# EAGLE board OpenBook_Board (EAGLE 9.7.0)
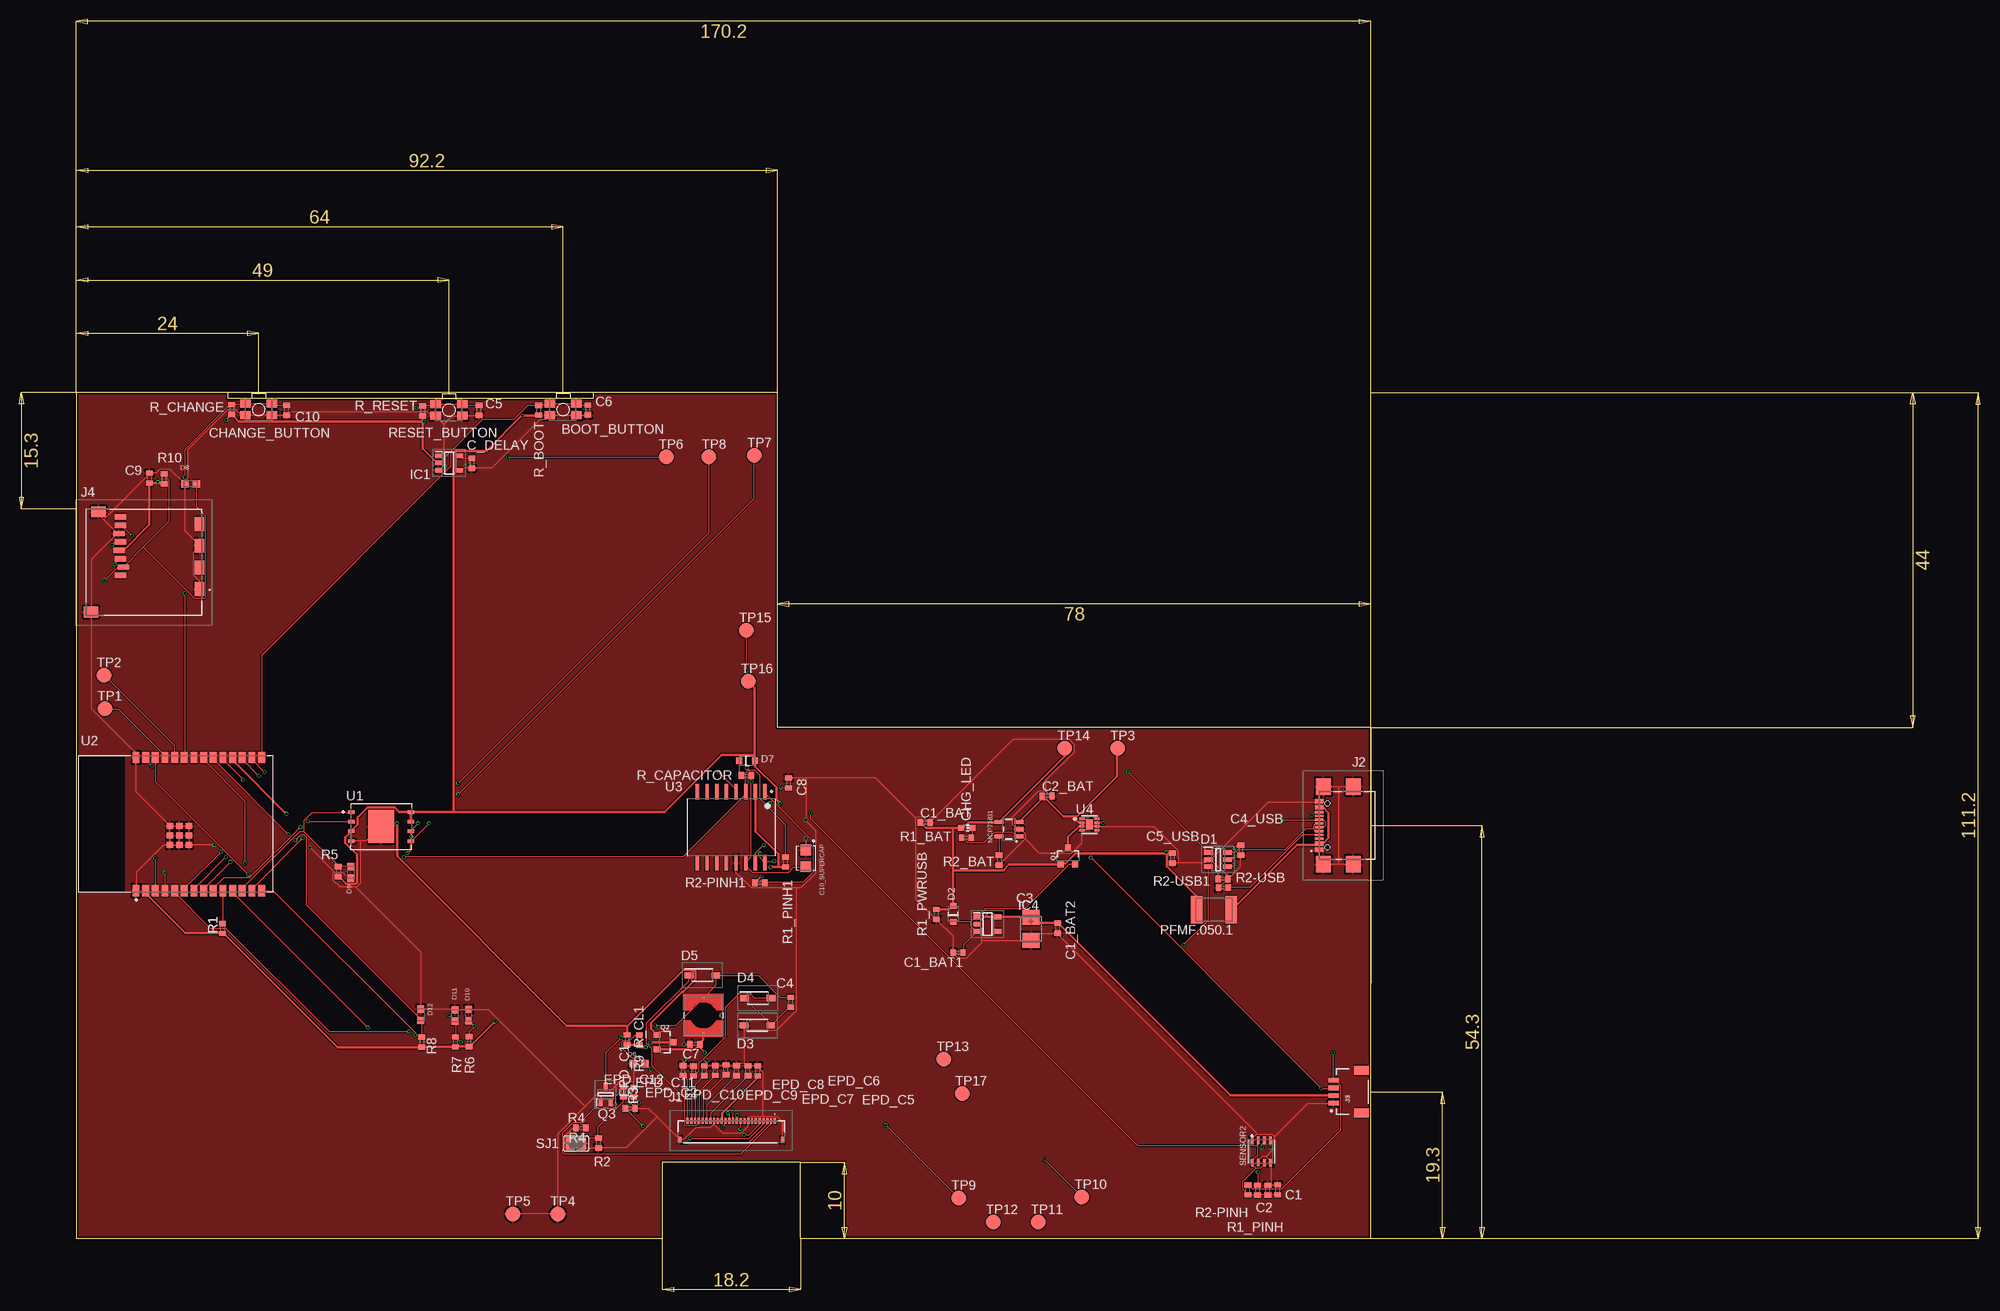
[diagram p0: board, top side]
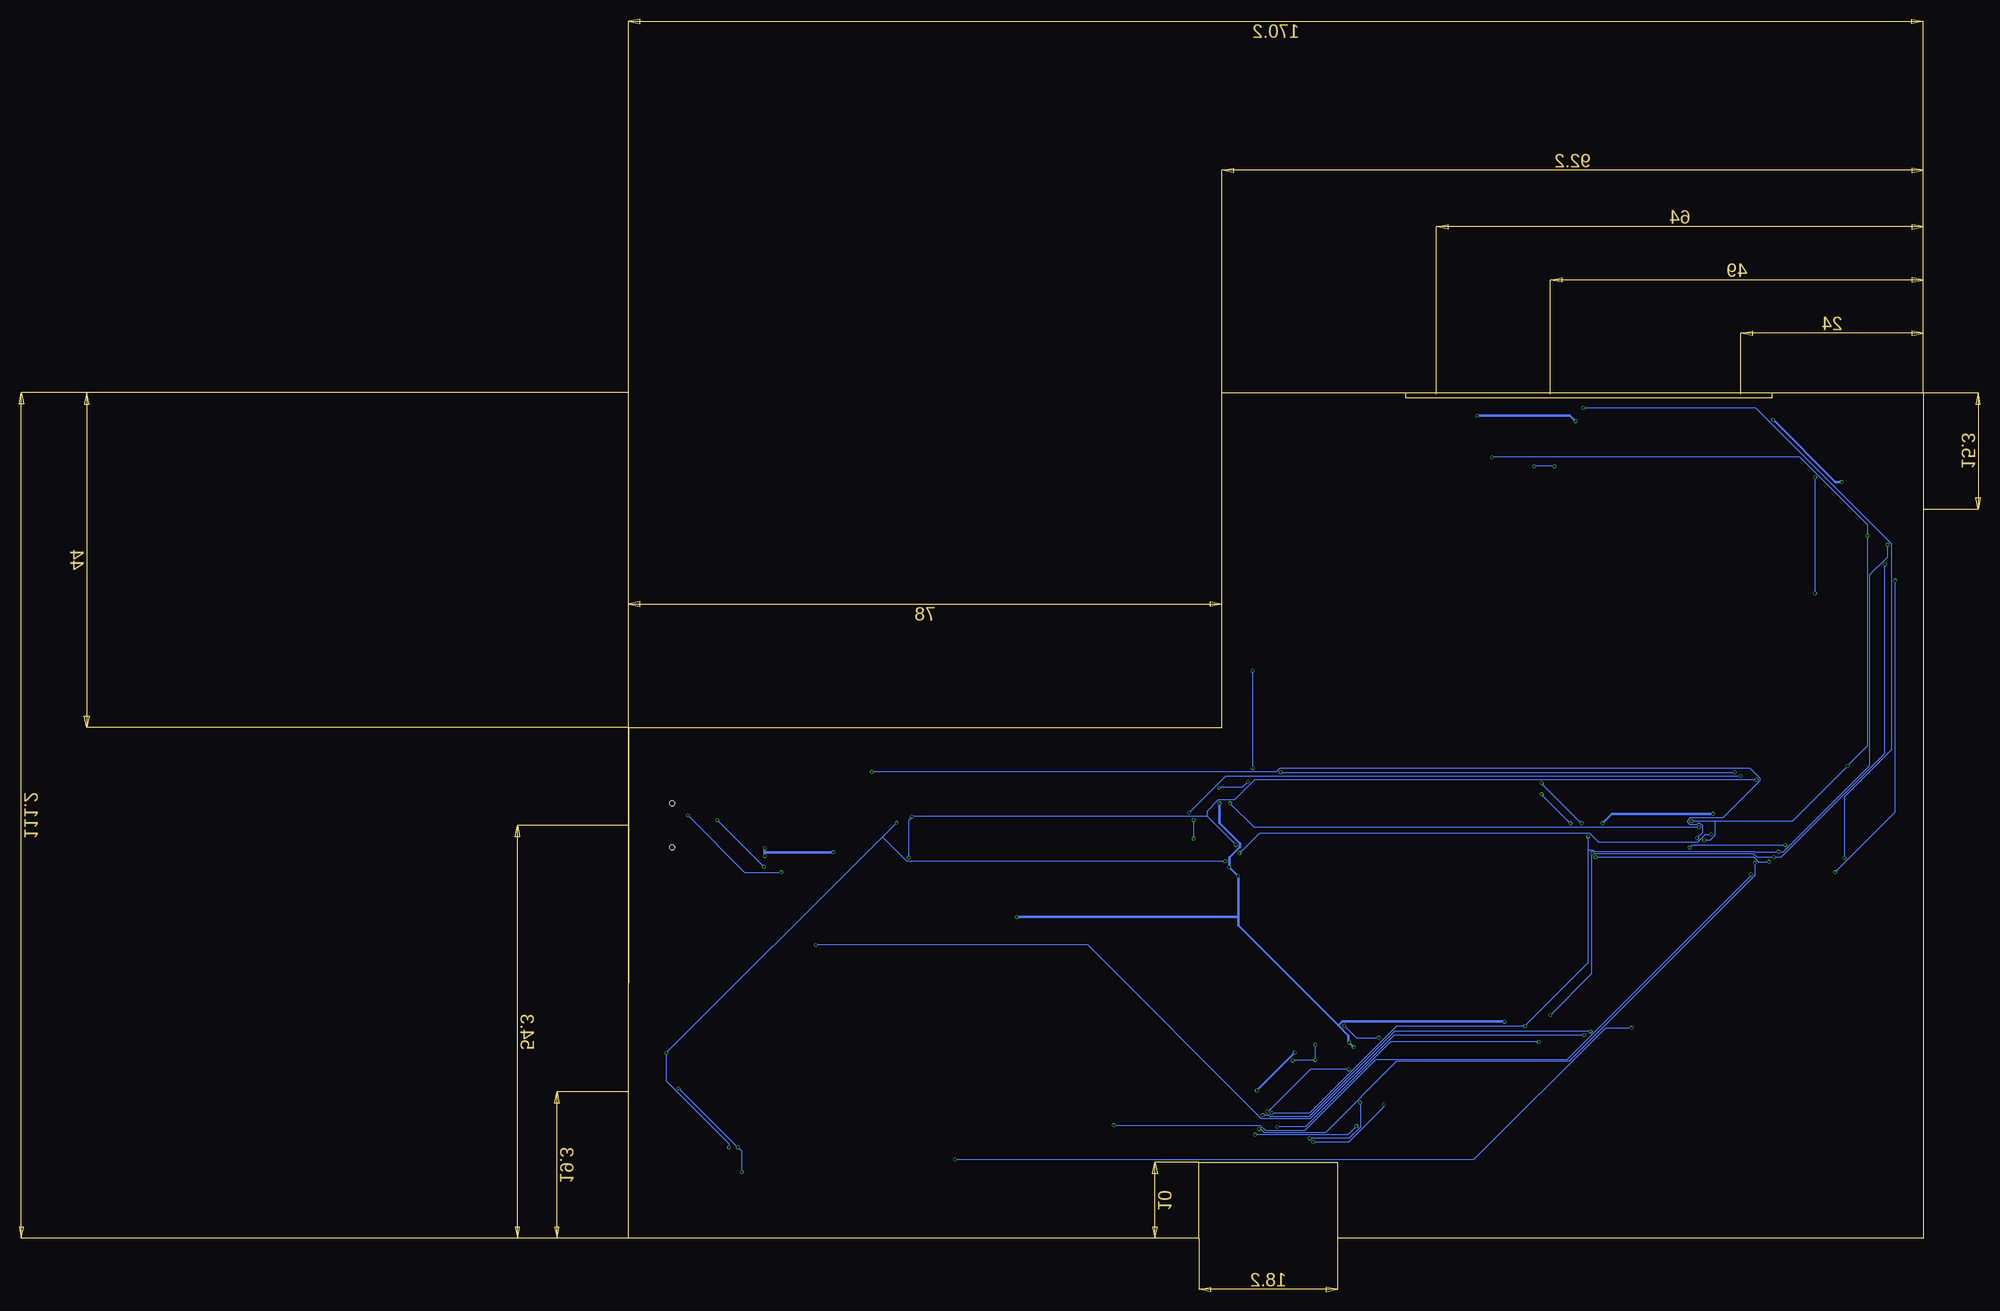
[diagram p1: board, bottom side, seen from below]

Size 170.2 x 111.2 mm. Coordinates in mm from the lower left corner, seen from the top.
Outline: 170.2,67.2 170.2,0 95.2,0 95.2,10 77,10 77,0 0,0 0,111.2 19.9,111.2
Outline: 170.2,67.2 170.2,111.2
Outline: 68,111.2 92.2,111.2 92.2,67.2 170.2,67.2
Outline: 68,111.2 19.9,111.2
Outline: 19.9,111.2 19.9,110.5 68,110.5 68,111.2
Copper layers (1*16): Top 0.035mm / dielectric 1.6mm / Bottom 0.035mm
Design rules "jlcpcb-2layers.dru": minimum track width 5mil, minimum drill 0.3mm, track to track 5mil, track to pad 5mil, pad to pad 5mil, via to via 5mil, smd to smd 5mil, copper to edge 0.2mm, drill to drill 6mil, minimum pad ring 10mil, minimum via ring 3mil, stop-mask expansion 4mil, vias tented up to drill 0mil, thermal gap 10mil
Net classes: 0 default: width 0.15 mm; 1 Power: width 0.3 mm

## Footprints (pad centres in the part's own frame; a part is rotated, then mirrored left to right if it is on the bottom)
MYBUTTON = smd 1.4 x 1.05: 1 1.75,0.75; 2 -1.75,0.75; 3 -1.75,-0.75; 4 1.75,-0.75
EAGLE-LTSPICE_C0402 = smd 0.7 x 0.9: 1 -0.65,0; 2 0.65,0
RCL_CT3528 = smd 2 x 2.2: + -1.5,0; - 1.5,0
CAPCP3225X100N = smd 1.4 x 1.4: 1 -1.1,0; 2 1.1,0
ADAFRUIT_CHIP-LED0603 = smd 0.8 x 0.8: A 0,-0.75; C 0,0.75
SOT95P280X145-6N = smd 1.2 x 0.6: 1 -1.25,0.95; 2 -1.25,0; 3 -1.25,-0.95; 4 1.25,-0.95; 5 1.25,0; 6 1.25,0.95
ESP32_WROVER_AVX---SD0805S020S1R0_AVX_SD0805S020S1R0_0 = smd 0.8 x 0.9: 1 -1.05,0; 2 1.05,0
SOD3716X135N = smd 1.15 x 0.8: 1 -1.75,0; 2 1.75,0
DIOC1608X36N = smd 0.97 x 0.94: 1 -0.75,0; 2 0.75,0
SOT95P280X120-5N = smd 0.9 x 0.6: 1 -1.4,0.95; 2 -1.4,0; 3 -1.4,-0.95; 4 1.4,-0.95; 5 1.4,0.95
FH34SRJ24S05SH99 = smd 0.3 x 0.8: 1 5.75,1.45; 2 5.25,1.45; 3 4.75,1.45; 4 4.25,1.45; 5 3.75,1.45; 6 3.25,1.45; 7 2.75,1.45; 8 2.25,1.45; 9 1.75,1.45; 10 1.25,1.45; 11 0.75,1.45; 12 0.25,1.45; 13 -0.25,1.45; 14 -0.75,1.45; 15 -1.25,1.45; 16 -1.75,1.45; 17 -2.25,1.45; 18 -2.75,1.45; 19 -3.25,1.45; 20 -3.75,1.45; 21 -4.25,1.45; 22 -4.75,1.45; 23 -5.25,1.45; 24 -5.75,1.45 | smd 0.4 x 0.8: MP1 6.75,-1.05; MP2 -6.75,-1.05
SAMACSYS_PARTS_USB4110GFA = smd 0.3 x 1.15: A1 -3.35,3.678; A4 -2.55,3.678; A5 -1.25,3.678; A6 -0.25,3.678; A7 0.25,3.678; A8 1.25,3.678; A9 2.55,3.678; A12 3.35,3.678; B1 3.05,3.678; B4 2.25,3.678; B5 1.75,3.678; B6 0.75,3.678; B7 -0.75,3.678; B8 -1.75,3.678; B9 -2.25,3.678; B12 -3.05,3.678 | smd 2.18 x 2: MP1 -5.11,-0.827; MP2 5.11,-0.827; MP3 -5.11,3.103; MP4 5.11,3.103 | hole 0.65: -2.89,2.603; 2.89,2.603
JST04_1MM_RA = smd 0.6 x 1.35: 1 -1.5,0; 2 -0.5,0; 3 0.5,0; 4 1.5,0 | smd 1.2 x 2: NC1 2.8,-3.675; NC2 -2.8,-3.675
112ATAARR03ATTEND = smd 1.8 x 1.2: G1 10.6,10.4; G2 4.9,10.4; S1 7.75,10.4; S2 2.05,10.4 | smd 1.4 x 1.9: G3 13.6,-3.85; G4 0.45,-2.85 | smd 0.7 x 1.5: P1 8.8,0; P2 7.7,0.4; P3 6.6,0; P4 5.5,-0.2; P5 4.4,0; P6 3.3,-0.2; P7 2.2,0; P8 1.1,0
IND_4828-WE-TPC_WRE = smd 0.127 x 0.127: 1 -2.286,0; 2 2.286,0
ESP32_WROVER_SPARKFUN-IC-POWER_SOT23-5 = smd 0.55 x 1.2: 1 -0.95,-1.3; 2 0,-1.3; 3 0.95,-1.3; 4 0.95,1.3; 5 -0.95,1.3
ESP32C6_VARISTOR_CT/CN1812 = smd 1.5 x 3.6: 1 -2.25,0; 2 2.25,0
ESP32_WROVER_SPARKFUN-DISCRETESEMI_SOT23-3 = smd 0.8 x 0.9: 1 -0.95,-1; 2 0.95,-1; 3 0,1.1
SOT65P210X110-3N = smd 1.05 x 0.5: 1 -1.05,0.65; 2 -1.05,-0.65; 3 1.05,0
ESP32_WROVER_EAGLE-LTSPICE_R0402 = smd 0.7 x 0.9: 1 -0.65,0; 2 0.65,0
ESP32_WROVER_BME680_PSON80P300X300X100-8N = smd 1.016 x 0.5: 1 1.458,1.2; 2 1.458,0.4; 3 1.458,-0.4; 4 1.458,-1.2; 5 -1.458,-1.22; 6 -1.458,-0.4; 7 -1.458,0.4; 8 -1.458,1.2
SJ = smd 1.168 x 1.6: 1 -0.762,0; 2 0.762,0
TP20R = smd 2 x 2: TP 0,0
SON127P600X800X80-9N = smd 0.94 x 0.44: 1 -3.895,1.905; 2 -3.895,0.635; 3 -3.895,-0.635; 4 -3.895,-1.905; 5 3.895,-1.905; 6 3.895,-0.635; 7 3.895,0.635; 8 3.895,1.905 | smd 3.4 x 4.3: 9 0,0
XCVR_ESP32-C6-WROOM-1-N8 = smd 1.5 x 0.9: 1 -8.75,5.26; 2 -8.75,3.99; 3 -8.75,2.72; 4 -8.75,1.45; 5 -8.75,0.18; 6 -8.75,-1.09; 7 -8.75,-2.36; 8 -8.75,-3.63; 9 -8.75,-4.9; 10 -8.75,-6.17; 11 -8.75,-7.44; 12 -8.75,-8.71; 13 -8.75,-9.98; 14 -8.75,-11.25; 15 8.75,-11.25; 16 8.75,-9.98; 17 8.75,-8.71; 18 8.75,-7.44; 19 8.75,-6.17; 20 8.75,-4.9; 21 8.75,-3.63; 22 8.75,-2.36; 23 8.75,-1.09; 24 8.75,0.18; 25 8.75,1.45; 26 8.75,2.72; 27 8.75,3.99; 28 8.75,5.26 | smd 0.8 x 0.8: 29_1 -2.755,0.79; 29_2 -1.505,0.79; 29_3 -0.255,0.79; 29_4 -2.755,-0.46; 29_5 -1.505,-0.46; 29_6 -0.255,-0.46; 29_7 -2.755,-1.71; 29_8 -1.505,-1.71; 29_9 -0.255,-1.71
SOIC127P1032X265-16N = smd 2.05 x 0.59: 1 -4.655,4.445; 2 -4.655,3.175; 3 -4.655,1.905; 4 -4.655,0.635; 5 -4.655,-0.635; 6 -4.655,-1.905; 7 -4.655,-3.175; 8 -4.655,-4.445; 9 4.655,-4.445; 10 4.655,-3.175; 11 4.655,-1.905; 12 4.655,-0.635; 13 4.655,0.635; 14 4.655,1.905; 15 4.655,3.175; 16 4.655,4.445
SON50P200X200X80-9N = smd 0.76 x 0.27: 1 -0.985,0.75; 2 -0.985,0.25; 3 -0.985,-0.25; 4 -0.985,-0.75; 5 0.985,-0.75; 6 0.985,-0.25; 7 0.985,0.25; 8 0.985,0.75 | smd 0.9 x 1.3: 9 0,0

## Placement (x,y rotation side)
BOOT_BUTTON  BOOT_BUTTON  [MYBUTTON]  64,108.97 180 top
C1  100nF  [EAGLE-LTSPICE_C0402]  157.92,6.4 90 top
C1_BAT  4.7uF  [EAGLE-LTSPICE_C0402]  111.6,54.68 0 top
C1_BAT1  4.7uF  [EAGLE-LTSPICE_C0402]  115.93,37.58 180 top
C1_BAT2  4.7uF  [EAGLE-LTSPICE_C0402]  129.02,40.79 270 top
C2  100nF  [EAGLE-LTSPICE_C0402]  156.64,6.35 90 top
C2_BAT  4.7uF  [EAGLE-LTSPICE_C0402]  127.61,58.18 0 top
C3  100uF TANT  [RCL_CT3528]  125.5,40.69 270 top
C4  4.7uF/25V  [EAGLE-LTSPICE_C0402]  93.94,31.05 90 top
C4_USB  100nF  [EAGLE-LTSPICE_C0402]  153.1,51.05 270 top
C5  1uF  [EAGLE-LTSPICE_C0402]  52.97,108.87 270 top
C5_USB  4.7uF  [EAGLE-LTSPICE_C0402]  144.1,49.99 270 top
C6  100nF  [EAGLE-LTSPICE_C0402]  67.26,108.9 270 top
C7  10uF  [EAGLE-LTSPICE_C0402]  81.31,25.54 180 top
C8  100nF  [EAGLE-LTSPICE_C0402]  93.64,59.88 90 top
C9  100nF  [EAGLE-LTSPICE_C0402]  9.64,99.96 90 top
C10  100nF  [EAGLE-LTSPICE_C0402]  27.66,108.86 270 top
C10_SUPERCAP  CPH3225A  [CAPCP3225X100N]  95.92,49.98 270 top
C_DELAY  100nF  [EAGLE-LTSPICE_C0402]  52.02,101.89 270 top
CHANGE_BUTTON  CHANGE_BUTTON  [MYBUTTON]  24,108.97 180 top
CHG_LED  [ADAFRUIT_CHIP-LED0603]  117.05,53.96 270 top
D1  USBLC6-2SC6Y  [SOT95P280X145-6N]  150.09,49.8 0 top
D2  ESP32_WROVER_AVX---SD0805S020S1R0_AVX_SD0805S020S1R0_0_0AVX_SD0805S020S1R0_0_0  [ESP32_WROVER_AVX---SD0805S020S1R0_AVX_SD0805S020S1R0_0]  115.29,42.65 90 top
D3  MBR0530  [SOD3716X135N]  89.56,28 0 top
D4  MBR0530  [SOD3716X135N]  89.6,31.6 0 top
D5  MBR0530  [SOD3716X135N]  82.32,34.61 0 top
D6  PGB1010603MR  [DIOC1608X36N]  73.98,23 0 top
D7  ESP32_WROVER_AVX---SD0805S020S1R0_AVX_SD0805S020S1R0_0_0AVX_SD0805S020S1R0_0_0  [ESP32_WROVER_AVX---SD0805S020S1R0_AVX_SD0805S020S1R0_0]  88.2,62.81 0 top
D8  PGB1010603MR  [DIOC1608X36N]  15.06,99.2 0 top
D9  PGB1010603MR  [DIOC1608X36N]  36.11,48.14 90 top
D10  PGB1010603MR  [DIOC1608X36N]  51.6,29.37 270 top
D11  PGB1010603MR  [DIOC1608X36N]  49.8,29.3 270 top
D12  PGB1010603MR  [DIOC1608X36N]  45.3,29.42 270 top
EPD_C1  1uF/50V  [EAGLE-LTSPICE_C0402]  73.3,19.22 90 top
EPD_C2  1uF/50V  [EAGLE-LTSPICE_C0402]  72.83,17.1 0 top
EPD_C5  1uF/50V  [EAGLE-LTSPICE_C0402]  89.6,22.04 90 top
EPD_C6  1uF/50V  [EAGLE-LTSPICE_C0402]  88.3,22.05 90 top
EPD_C7  1uF/50V  [EAGLE-LTSPICE_C0402]  86.8,22.06 90 top
EPD_C8  1uF/50V  [EAGLE-LTSPICE_C0402]  85.42,22.18 90 top
EPD_C9  1uF/50V  [EAGLE-LTSPICE_C0402]  84.02,22.09 90 top
EPD_C10  1uF/50V  [EAGLE-LTSPICE_C0402]  82.58,22.05 90 top
EPD_C11  1uF/50V  [EAGLE-LTSPICE_C0402]  81.18,22.03 90 top
EPD_C12  1uF/50V  [EAGLE-LTSPICE_C0402]  79.78,22.09 90 top
IC1  BD5229G-TR  [SOT95P280X120-5N]  49.03,101.95 0 top
IC4  XC6220A331MR-G  [SOT95P280X120-5N]  119.77,41.32 0 top
J1  FH34SRJ-24S-0.5SH_99_  [FH34SRJ24S05SH99]  86.1,14 0 top
J2  SAMACSYS_PARTS_USB4110-GF-A  [SAMACSYS_PARTS_USB4110GFA]  167.06,54.3 90 top
J3  QWIIC_RIGHT_ANGLE  [JST04_1MM_RA]  165.28,19.3 90 top
J4  112A-TAAR-R03_ATTEND  [112ATAARR03ATTEND]  5.82,95.96 270 top
L1  68uH  [IND_4828-WE-TPC_WRE]  82.45,29.33 270 top
MCP73831  ESP32_WROVER_SPARKFUN-IC-POWER_MCP73831  [ESP32_WROVER_SPARKFUN-IC-POWER_SOT23-5]  122.61,53.81 90 top
PFMF.050.1  ESP32C6_VARISTORCN1812  [ESP32C6_VARISTOR_CT/CN1812]  149.56,43.2 180 top
Q1  20V/4.2A/52mΩ/1.4W  [ESP32_WROVER_SPARKFUN-DISCRETESEMI_SOT23-3]  130.36,50.26 0 top
Q2  20V/4.2A/52mΩ/1.4W  [ESP32_WROVER_SPARKFUN-DISCRETESEMI_SOT23-3]  77.36,25.82 270 top
Q3  SI1308EDL-T1-GE3  [SOT65P210X110-3N]  69.59,18.95 90 top
R1  10K  [ESP32_WROVER_EAGLE-LTSPICE_R0402]  19.24,40.75 90 top
R1_BAT  200  [ESP32_WROVER_EAGLE-LTSPICE_R0402]  117.02,52.68 0 top
R1_PINH  10K  [ESP32_WROVER_EAGLE-LTSPICE_R0402]  155.28,6.35 90 top
R1_PINH1  10K  [ESP32_WROVER_EAGLE-LTSPICE_R0402]  93.24,49.49 270 top
R1_PWRUSB  100K  [ESP32_WROVER_EAGLE-LTSPICE_R0402]  113.06,42.6 90 top
R2  2.2  [ESP32_WROVER_EAGLE-LTSPICE_R0402]  68.66,12.55 90 top
R2-PINH  10K  [ESP32_WROVER_EAGLE-LTSPICE_R0402]  154,6.39 90 top
R2-PINH1  10K  [ESP32_WROVER_EAGLE-LTSPICE_R0402]  89.87,46.76 180 top
R2-USB  5k1  [ESP32_WROVER_EAGLE-LTSPICE_R0402]  150.74,47.28 0 top
R2-USB1  5k1  [ESP32_WROVER_EAGLE-LTSPICE_R0402]  150.79,46.12 0 top
R2_BAT  2K  [ESP32_WROVER_EAGLE-LTSPICE_R0402]  121.32,49.73 90 top
R3  0.47  [ESP32_WROVER_EAGLE-LTSPICE_R0402]  71.96,19.29 270 top
R4  10K  [ESP32_WROVER_EAGLE-LTSPICE_R0402]  66.33,14.54 180 top
R5  10K  [ESP32_WROVER_EAGLE-LTSPICE_R0402]  34.46,48.21 270 top
R6  10K  [ESP32_WROVER_EAGLE-LTSPICE_R0402]  51.66,25.89 270 top
R7  10K  [ESP32_WROVER_EAGLE-LTSPICE_R0402]  49.86,25.85 270 top
R8  10K  [ESP32_WROVER_EAGLE-LTSPICE_R0402]  45.44,25.81 270 top
R9  10K  [ESP32_WROVER_EAGLE-LTSPICE_R0402]  74.04,26.09 270 top
R10  10K  [ESP32_WROVER_EAGLE-LTSPICE_R0402]  11.56,99.87 270 top
R_BOOT  10K  [ESP32_WROVER_EAGLE-LTSPICE_R0402]  60.8,108.88 90 top
R_CAPACITOR  15  [ESP32_WROVER_EAGLE-LTSPICE_R0402]  88.1,60.86 180 top
R_CHANGE  10K  [ESP32_WROVER_EAGLE-LTSPICE_R0402]  20.46,108.97 90 top
R_CL1  10K  [ESP32_WROVER_EAGLE-LTSPICE_R0402]  72.42,26.12 90 top
R_RESET  10K  [ESP32_WROVER_EAGLE-LTSPICE_R0402]  45.56,108.79 90 top
RESET_BUTTON  RESET BUTTON  [MYBUTTON]  49,108.91 180 top
SENSOR2  BME680  [ESP32_WROVER_BME680_PSON80P300X300X100-8N]  155.77,11.44 90 top
SJ1  [SJ]  65.7,12.48 180 top
TP1  TPTP20R  [TP20R]  3.77,69.64 0 top
TP2  TPTP20R  [TP20R]  3.69,74.04 0 top
TP3  TPTP20R  [TP20R]  136.89,64.42 0 top
TP4  TPTP20R  [TP20R]  63.31,3.22 0 top
TP5  TPTP20R  [TP20R]  57.43,3.22 0 top
TP6  TPTP20R  [TP20R]  77.55,102.72 0 top
TP7  TPTP20R  [TP20R]  89.17,102.92 0 top
TP8  TPTP20R  [TP20R]  83.19,102.72 0 top
TP9  TPTP20R  [TP20R]  116.01,5.32 0 top
TP10  TPTP20R  [TP20R]  132.2,5.44 0 top
TP11  TPTP20R  [TP20R]  126.45,2.14 0 top
TP12  TPTP20R  [TP20R]  120.55,2.14 0 top
TP13  TPTP20R  [TP20R]  114.07,23.57 0 top
TP14  TPTP20R  [TP20R]  129.95,64.44 0 top
TP15  TPTP20R  [TP20R]  88.1,79.94 0 top
TP16  TPTP20R  [TP20R]  88.35,73.24 0 top
TP17  TPTP20R  [TP20R]  116.5,19.04 0 top
U1  W25Q512JVEIQ  [SON127P600X800X80-9N]  40.09,54.16 0 top
U2  ESP32-C6-WROOM-1-N8  [XCVR_ESP32-C6-WROOM-1-N8]  13.13,54.48 90 top
U3  DS3231SN#  [SOIC127P1032X265-16N]  86.1,54.05 270 top
U4  MAX17048G+T10  [SON50P200X200X80-9N]  133.2,54.42 0 top

## Library data of the parts
BOOT_BUTTON CHANGE_BUTTON CHG_LED PFMF.050.1 RESET_BUTTON SJ1 TP1-TP17 = DeskAssistant
C1 C1_BAT C1_BAT1 C1_BAT2 C2 C2_BAT C4 C4_USB C5 C5_USB C6-C10 C_DELAY EPD_C1 EPD_C2 EPD_C5-EPD_C12 = DeskAssistant; SPICEMODEL: NONE; SPICEPREFIX: C
C3 = DeskAssistant; SPICEPREFIX: C
C10_SUPERCAP = DeskAssistant; AVAILABILITY: Not in stock; CHECK_PRICES: https://www.snapeda.com/parts/CPH3225A/Seiko+Instruments/view-part/?ref=eda; DESCRIPTION: 11 mF (EDLC) Supercapacitor 3.3 V 1210 (3225 Metric) - -; MF: Seiko Instruments; MP: CPH3225A; PACKAGE: 1210 Seiko; PRICE: None; PURCHASE-URL: https://www.snapeda.com/api/url_track_click_mouser/?unipart_id=562593&manufacturer=Seiko Instruments&part_name=CPH3225A&search_term=None; SNAPEDA_LINK: https://www.snapeda.com/parts/CPH3225A/Seiko+Instruments/view-part/?ref=snap
D1 = DeskAssistant; AVAILABILITY: In Stock; CHECK_PRICES: https://www.snapeda.com/parts/USBLC6-2SC6Y/STMicroelectronics/view-part/?ref=eda; DESCRIPTION: 17V Clamp 5A (8/20µs) Ipp Tvs Diode Surface Mount SOT-23-6; MF: STMicroelectronics; MP: USBLC6-2SC6Y; PACKAGE: SOT-23-6 STMicroelectronics; PRICE: None; SNAPEDA_LINK: https://www.snapeda.com/parts/USBLC6-2SC6Y/STMicroelectronics/view-part/?ref=snap
D2 D7 = DeskAssistant; CENTROID_NOT_SPECIFIED: No; DATASHEET: http://datasheets.avx.com/schottky.pdf; DIGIKEY_DESCRIPTION: DIODE SCHOTTKY 20V 1A 0805; DIGIKEY_PART_NUMBER: 478-7800-1-ND; LEAD_FREE: yes; MF: AVX; MOUSER_PART_NUMBER: 581-SD0805S020S1R0; PACKAGE: 0805 (2012 metric); PREFIX: D; ROHS: yes; TEMPERATURE_RANGE_HIGH: +125°C; TEMPERATURE_RANGE_LOW: -55°C
D3-D5 = DeskAssistant; AVAILABILITY: In Stock; CHECK_PRICES: https://www.snapeda.com/parts/MBR0530/Onsemi/view-part/?ref=eda; DESCRIPTION: Diode Schottky 30 V 500mA Surface Mount SOD-123; MF: ON Semiconductor; MP: MBR0530; PACKAGE: SOD-123-2 ON Semiconductor; PRICE: None; PURCHASE-URL: https://www.snapeda.com/api/url_track_click_mouser/?unipart_id=179458&manufacturer=ON Semiconductor&part_name=MBR0530&search_term=None; SNAPEDA_LINK: https://www.snapeda.com/parts/MBR0530/Onsemi/view-part/?ref=snap
D6 D8-D12 = DeskAssistant; AVAILABILITY: In Stock; CHECK_PRICES: https://www.snapeda.com/parts/PGB1010603MR/Littelfuse/view-part/?ref=eda; DESCRIPTION: 150V (Typ) Clamp - Ipp Tvs Diode Surface Mount 0603 (1608 Metric); MF: Littelfuse Inc.; MP: PGB1010603MR; PACKAGE: 0603 Littelfuse Inc.; PRICE: None; PURCHASE-URL: https://www.snapeda.com/api/url_track_click_mouser/?unipart_id=5659453&manufacturer=Littelfuse Inc.&part_name=PGB1010603MR&search_term=None; SNAPEDA_LINK: https://www.snapeda.com/parts/PGB1010603MR/Littelfuse/view-part/?ref=snap
IC1 = DeskAssistant; DESCRIPTION: Voltage Detector with Adjustable Delay Time: CMOS processes are utilized to develop high precision, low current consumption CMOS reset ICs that allow arbitrary setting of the delay time. The extensive lineup includes both Nch Open Drain and CMOS output types in a wide range of detection voltages (from 2.3V to 6.0V, in 0.1V steps), enabling selection of the ideal solution based on customer requirements. In addition, the entire series is of course both lead-free and RoHS-compliant.; HEIGHT: 1.25mm; MANUFACTURER_NAME: ROHM Semiconductor; MANUFACTURER_PART_NUMBER: BD5229G-TR; MOUSER_PART_NUMBER: 755-BD5229G-TR; MOUSER_PRICE-STOCK: https://www.mouser.co.uk/ProductDetail/ROHM-Semiconductor/BD5229G-TR?qs=4kLU8WoGk0vvnhrrYwdszw%3D%3D
IC4 = DeskAssistant; DESCRIPTION: LDO Voltage Regulators; HEIGHT: 1.2mm; MANUFACTURER_NAME: Torex; MANUFACTURER_PART_NUMBER: XC6220A331MR-G; MOUSER_PART_NUMBER: 865-XC6220A331MR-G; MOUSER_PRICE-STOCK: https://www.mouser.co.uk/ProductDetail/Torex-Semiconductor/XC6220A331MR-G?qs=AsjdqWjXhJ8ZSWznL1J0gg%3D%3D
J1 = DeskAssistant; DESCRIPTION: 24 Position FFC, FPC Connector Contacts, Top and Bottom 0.020" (0.50mm) Surface Mount, Right Angle; HEIGHT: 1.1mm; MANUFACTURER_NAME: Hirose; MANUFACTURER_PART_NUMBER: FH34SRJ-24S-0.5SH(99); MOUSER_PART_NUMBER: 798-FH34SRJ24S05SH99; MOUSER_PRICE-STOCK: https://www.mouser.co.uk/ProductDetail/Hirose-Connector/FH34SRJ-24S-0.5SH99?qs=vcbW%252B4%252BSTIpKBl5ap9J8Fw%3D%3D
J2 = DeskAssistant; DESCRIPTION: CONN USB 2.0 TYPE-C R/A SMT; HEIGHT: 3.26mm; MANUFACTURER_NAME: GCT (GLOBAL CONNECTOR TECHNOLOGY); MANUFACTURER_PART_NUMBER: USB4110-GF-A; MOUSER_PART_NUMBER: 640-USB4110-GF-A; MOUSER_PRICE-STOCK: https://www.mouser.co.uk/ProductDetail/GCT/USB4110-GF-A?qs=KUoIvG%2F9IlYiZvIXQjyJeA%3D%3D
J3 = DeskAssistant; PROD_ID: CONN-13694
J4 = DeskAssistant; DESCRIPTION: Micro SD Card Socket, Push-Push Type, Top Mount, SMT, H=1.83mm, 10u; HEIGHT: 1.9mm; MANUFACTURER_NAME: ATTEND; MANUFACTURER_PART_NUMBER: 112A-TAAR-R03 ATTEND
L1 = DeskAssistant; COPYRIGHT: Copyright (C) 2024 Ultra Librarian. All rights reserved.; MANUFACTURER_PART_NUMBER: 744043680; MFR_NAME: Wurth Electronics
MCP73831 = DeskAssistant; PROD_ID: IC-09995
Q1 Q2 = DeskAssistant; PROD_ID: TRAN-14388
Q3 = DeskAssistant; AVAILABILITY: In Stock; CHECK_PRICES: https://www.snapeda.com/parts/SI1308EDL-T1-GE3/Vishay+Siliconix/view-part/?ref=eda; DESCRIPTION: Si1308EDL-T1-GE3 N-channel MOSFET Transistor, 1.5 A, 30 V, 3-Pin SC-70 | Siliconix / Vishay SI1308EDL-T1-GE3; MF: Vishay Siliconix; MP: SI1308EDL-T1-GE3; PACKAGE: SOT-323 Vishay Semiconductor; PRICE: None; PURCHASE-URL: https://www.snapeda.com/api/url_track_click_mouser/?unipart_id=274603&manufacturer=Vishay Siliconix&part_name=SI1308EDL-T1-GE3&search_term=None; SNAPEDA_LINK: https://www.snapeda.com/parts/SI1308EDL-T1-GE3/Vishay+Siliconix/view-part/?ref=snap
R1 R1_BAT R1_PINH R1_PINH1 R1_PWRUSB R2 R2-PINH R2-PINH1 R2-USB R2-USB1 R2_BAT R3-R10 R_BOOT R_CAPACITOR R_CHANGE R_CL1 R_RESET = DeskAssistant; SPICEMODEL: NONE; SPICEPREFIX: R
SENSOR2 = DeskAssistant; AVAILABILITY: Unavailable; DESCRIPTION: Integrated Environmental Unit; MF: Bosch Sensortec; MP: BME680; PACKAGE: LGA-8 Bosch Tools; PRICE: None
U1 = DeskAssistant; AVAILABILITY: In Stock; CHECK_PRICES: https://www.snapeda.com/parts/W25Q512JVEIQ/Winbond+Electronics/view-part/?ref=eda; DESCRIPTION: FLASH - NOR Memory IC 512Mb (64M x 8) SPI - Quad I/O 133 MHz 8-WSON (8x6); MF: Winbond Electronics; MP: W25Q512JVEIQ; PACKAGE: Package; PRICE: None; SNAPEDA_LINK: https://www.snapeda.com/parts/W25Q512JVEIQ/Winbond+Electronics/view-part/?ref=snap
U2 = DeskAssistant; AVAILABILITY: In Stock; CHECK_PRICES: https://www.snapeda.com/parts/ESP32-C6-WROOM-1-N8/Espressif+Systems/view-part/?ref=eda; DESCRIPTION: Multiprotocol Modules ESP32-C6 module, Wi-Fi 6 in 2.4 GHz band, Bluetooth 5, Zigbee 3.0 and Thread. ESP34-WROOM Compatible - ENGINEERING SAMPLE; MF: Espressif Systems; MP: ESP32-C6-WROOM-1-N8; PACKAGE: None; PRICE: None; SNAPEDA_LINK: https://www.snapeda.com/parts/ESP32-C6-WROOM-1-N8/Espressif+Systems/view-part/?ref=snap
U3 = DeskAssistant; AVAILABILITY: In Stock; CHECK_PRICES: https://www.snapeda.com/parts/DS3231SN%23/Analog+Devices/view-part/?ref=eda; DESCRIPTION: Extremely Accurate I²C-Integrated RTC/TCXO/Crystal; MF: Analog Devices; MP: DS3231SN#; PACKAGE: SOIC-16 Maxim; PRICE: None; PURCHASE-URL: https://www.snapeda.com/api/url_track_click_mouser/?unipart_id=99048&manufacturer=Analog Devices&part_name=DS3231SN#&search_term=None; SNAPEDA_LINK: https://www.snapeda.com/parts/DS3231SN%23/Analog+Devices/view-part/?ref=snap
U4 = DeskAssistant; AVAILABILITY: In Stock; CHECK_PRICES: https://www.snapeda.com/parts/MAX17048G+T10/Analog+Devices/view-part/?ref=eda; DESCRIPTION: 3µA 1-Cell/2-Cell Fuel Gauge with ModelGauge; MF: Analog Devices; MP: MAX17048G+T10; PACKAGE: TDFN-8 Maxim; PRICE: None; PURCHASE-URL: https://www.snapeda.com/api/url_track_click_mouser/?unipart_id=329239&manufacturer=Analog Devices&part_name=MAX17048G+T10&search_term=None; SNAPEDA_LINK: https://www.snapeda.com/parts/MAX17048G+T10/Analog+Devices/view-part/?ref=snap

## Nets
3V3 [Power]: C1_BAT2.1 C3.+ C9.1 D7.2 IC1.2 IC4.5 J3.2 J4.P4 Q2.3 R1.1 R1_PINH1.2 R2-PINH1.2 R5.2 R6.2 R7.2 R8.2 R9.2 R10.2 R_BOOT.1 R_CHANGE.1 R_CL1.1 R_RESET.1 TP16.TP U1.3 U1.7 U1.8 U2.2 U3.2
32KHZ: R2-PINH1.1 U2.9 U3.1
DN: D1.6 J2.A7 J2.B7
DP: D1.4 J2.A6 J2.B6
EDP_3V3: TP17.TP
EDP_3V3_C: TP13.TP
EDP_BUSY: TP9.TP U2.26
EDP_CS: TP10.TP U2.11
EDP_DC: TP11.TP
EDP_RST: TP12.TP
EPD_3V3 [Power]: C7.1 EPD_C5.1 J1.15 J1.16 L1.2 Q2.2
EPD_3V3_C [Power]: Q2.1 R_CL1.2 U2.18
EPD_BUSY: J1.9
EPD_CS: D6.2 J1.12 R9.1
EPD_DC: J1.11 U2.5
EPD_RST: J1.10 U2.21
FLASH_CS: D9.2 R5.1 U1.1 U2.12
GDR: J1.2 Q3.1 R4.1
GND: BOOT_BUTTON.1 BOOT_BUTTON.2 C1.2 C1_BAT1.2 C1_BAT2.2 C1_BAT.2 C2.2 C2_BAT.2 C3.- C4_USB.2 C5.2 C5_USB.2 C6.2 C7.2 C8.2 C9.2 C10.2 C10_SUPERCAP.1 C_DELAY.2 CHANGE_BUTTON.1 CHANGE_BUTTON.2 D1.2 D3.1 D6.1 D8.1 D9.1 D10.1 D11.1 D12.1 EPD_C1.2 EPD_C2.2 EPD_C5.2 EPD_C6.2 EPD_C7.2 EPD_C8.2 EPD_C9.2 EPD_C10.2 EPD_C11.2 EPD_C12.2 IC1.3 IC4.2 J1.8 J1.17 J1.MP1 J1.MP2 J2.A1 J2.A12 J2.B1 J2.B12 J2.MP1 J2.MP2 J2.MP3 J2.MP4 J3.1 J4.G1 J4.G2 J4.G3 J4.G4 J4.P6 MCP73831.2 R1_PWRUSB.1 R2-USB1.1 R2-USB.2 R2.1 R2_BAT.1 R4.2 RESET_BUTTON.1 RESET_BUTTON.2 SENSOR2.1 SENSOR2.5 SENSOR2.7 SJ1.1 TP4.TP TP5.TP U1.4 U1.9 U2.1 U2.28 U2.29_1 U2.29_2 U2.29_3 U2.29_4 U2.29_5 U2.29_6 U2.29_7 U2.29_8 U2.29_9 U3.13 U4.1 U4.4 U4.6 U4.9
GPIO8: R1.2 U2.10
I2C_PW: C1.1 C2.1 R1_PINH.1 R2-PINH.1 SENSOR2.2 SENSOR2.6 SENSOR2.8 U2.17
INT_RTC: R1_PINH1.1 TP15.TP U2.8 U3.3
IO/BOOT: BOOT_BUTTON.3 BOOT_BUTTON.4 C6.1 R_BOOT.2 U2.15
IO/CHANGE: C10.1 CHANGE_BUTTON.3 CHANGE_BUTTON.4 R_CHANGE.2 U2.23
MISO: D12.2 J4.P7 R8.1 TP6.TP U1.2 U2.27
MOSI: D11.2 J1.14 J4.P3 R7.1 TP7.TP U1.5 U2.7
N$1: J2.A5 R2-USB1.2
N$2: C1_BAT1.1 D2.1 IC4.1 IC4.3 Q1.2
N$3: MCP73831.1 R1_BAT.1
N$4: J2.B5 R2-USB.1
N$5: CHG_LED.C R1_BAT.2
N$6: EPD_C12.1 J1.24
N$7: MCP73831.5 R2_BAT.2
N$8: C4.1 D3.2 D4.1
N$9: C_DELAY.1 IC1.5
N$10: EPD_C10.1 J1.22
N$12: EPD_C8.1 J1.20
N$13: EPD_C7.1 J1.19
N$14: EPD_C6.1 J1.18
N$16: EPD_C2.1 J1.5
N$17: EPD_C1.1 J1.4
N$22: D7.1 R_CAPACITOR.2
PREVGH: D5.1 EPD_C9.1 J1.21
PREVGL: D4.2 EPD_C11.1 J1.23
RESE: J1.3 Q3.2 R3.1
RESE': R2.2 R3.2 SJ1.2
RESET: C5.1 R_RESET.2 RESET_BUTTON.3 RESET_BUTTON.4 U2.3
RTC_RST: U2.16 U3.4
RX: TP2.TP U2.24
SCK: D10.2 J1.13 J4.P5 R6.1 TP8.TP U1.6 U2.6
SCL: J3.4 R2-PINH.2 SENSOR2.4 U2.20 U3.16 U4.7
SDA: J3.3 R1_PINH.2 SENSOR2.3 U2.19 U3.15 U4.8
SRC: C4.2 D5.2 L1.1 Q3.3
SS_SD: D8.2 J4.P2 R10.1 U2.4
TX: TP1.TP U2.25
USB_D+: D1.3 U2.14
USB_D-: D1.1 U2.13
VBAT [Power]: C2_BAT.1 MCP73831.3 Q1.3 TP3.TP U4.2 U4.3
VBUS [Power]: C1_BAT.1 C4_USB.1 C5_USB.1 CHG_LED.A D1.5 D2.2 MCP73831.4 PFMF.050.1.2 Q1.1 R1_PWRUSB.2 TP14.TP
VRTC: C8.1 C10_SUPERCAP.2 R_CAPACITOR.1 U3.14
VUSB [Power]: J2.A4 J2.A9 J2.B4 J2.B9 PFMF.050.1.1

## Tracks (layer width: path | path; a pad name or v marks a point on that pad's centre or on a via)
3V3  (via drill 0.3)
  Top 0.3: 10.73,99.31 11.43,99.31 11.49,99.23 R10.2 | 10.73,99.31 9.7,99.31 C9.1 9.63,99.17 9.63,93.83 6.3,90.51 5.68,90.51 J4.P4 | 45.57,107.41 45.57,103.81 47.37,102 47.58,102 IC1.2 | 45.57,107.41 45.57,108.1 R_RESET.1 | 45.57,107.41 21.4,107.41 20.5,108.31 R_CHANGE.1 20.36,108.24 v19.74,107.61 | R_BOOT.1 60.73,108.17 v58.66,108.17 58.52,108.1 53.95,103.53 49.86,103.53 49.65,103.32 49.65,56.09 | v45.7,107.41 45.57,107.41 | v10.73,99.44 10.73,99.31 | J3.2 165.23,18.84 151.73,18.84 129.15,41.41 C1_BAT2.1 129.01,41.48 126.24,41.48 125.62,42.1 C3.+ 125.48,42.24 121.19,42.24 IC4.5 121.05,42.24 v119.18,42.24 | U2.2 9.14,45.7 9.14,45.36 14.34,40.16 19.18,40.16 R1.1 19.39,40.1 34.35,25.14 45.29,25.14 R8.2 45.5,25.21 R7.2 50,25.28 51.59,25.28 R6.2 51.8,25.28 v55.05,28.53 | U1.7 43.97,54.85 43.97,56.02 U1.8 | R5.2 34.49,47.51 34.62,47.51 35.52,46.6 36.7,46.6 36.91,46.81 36.91,50.48 35.39,52.01 35.39,52.7 36.15,53.46 U1.3 36.22,53.67 36.98,54.43 36.98,55.33 38.3,56.65 41.9,56.65 42.45,56.09 43.84,56.09 U1.8 | 89.19,63.57 89.19,72.37 88.36,73.2 TP16.TP | 89.19,63.57 89.19,62.88 D7.2 89.26,62.67 89.26,62.05 92.03,59.28 92.03,57.69 v92.52,57.2 | R_CL1.1 72.44,25.48 74.03,25.48 R9.2 74.17,25.41 74.44,25.14 v74.86,25.14 | v75.48,25.76 78.39,25.76 Q2.3 | v90.09,47.64 89.26,46.81 R2-PINH1.2 | 92.31,48.82 93.21,48.82 R1_PINH1.2 | 92.31,48.82 v91.27,48.82 | 92.31,48.82 92.31,50.55 89.33,53.53 89.33,58.66 U3.2 | 49.65,56.09 77.35,56.09 84.83,63.57 89.19,63.57 | 49.65,56.09 44.11,56.09 U1.8
  Bottom 0.3: v58.66,108.17 46.47,108.17 v45.7,107.41 | v10.73,99.44 11.56,99.44 v19.74,107.61 | v74.86,25.14 v75.48,25.76 75.55,25.9 75.55,26.66 76.9,28.01 | 76.9,28.01 90.03,41.13 90.03,42.24 | 90.03,42.24 90.03,47.51 v90.09,47.64 v91.27,48.82 91.2,48.96 91.2,50.07 89.82,51.45 89.82,51.94 92.52,54.64 v92.52,57.2 | v55.05,28.53 76.38,28.53 76.9,28.01 | 90.03,42.24 v119.18,42.24
32KHZ  (via drill 0.3)
  Top 0.15: 91.51,57.58 90.58,58.52 90.58,58.66 U3.1 | 91.51,57.58 96.88,52.22 96.88,48.13 95.56,46.81 90.58,46.81 R2-PINH1.1 | v29.5,54.08 22.78,47.37 19.39,47.37 18.07,46.05 18.07,45.77 U2.9 | 91.51,57.58 v91.13,57.2
  Bottom 0.15: v29.5,54.08 88.02,54.08 v91.13,57.2
DN
  Top 0.15: 162.6,53.81 162.81,53.6 163.36,53.6 J2.B7 | 162.6,53.81 162.6,54.29 162.81,54.5 163.36,54.5 J2.A7 | 162.6,53.81 161.56,53.81 158.86,51.11 152.7,51.11 152.35,50.76 151.38,50.76 D1.6
DP  (via drill 0.3)
  Top 0.15: J2.A6 163.43,54.08 163.98,54.08 164.19,54.29 164.19,54.78 163.98,54.98 163.43,54.98 J2.B6 163.36,54.98 v158.51,54.98 | v152.42,48.89 151.38,48.89 D1.4
  Bottom 0.15: v158.51,54.98 v152.42,48.89
EDP_BUSY  (via drill 0.3)
  Top 0.15: v22.64,47.85 10.46,60.04 10.46,63.23 U2.26 | v106.44,14.89 115.99,5.33 TP9.TP
  Bottom 0.15: v22.64,47.85 22.64,47.71 46.81,23.55 71.95,23.55 81.3,14.2 86.49,14.2 87.19,14.89 v106.44,14.89
EDP_CS  (via drill 0.3)
  Top 0.15: v38.36,27.7 20.57,45.5 20.57,45.7 U2.11 | v127.28,10.39 132.2,5.47 TP10.TP
  Bottom 0.15: v38.36,27.7 41.76,27.7 59.07,10.39 v127.28,10.39
EPD_3V3  (via drill 0.3)
  Top 0.3: Q2.2 76.38,24.86 80.12,24.86 80.19,24.79 81.23,24.79 81.92,25.48 C7.1 | L1.2 82.41,27.01 82.41,26.11 81.99,25.69 C7.1 | J1.16 84.42,15.44 84.83,15.44 J1.15 84.9,15.58 84.9,16.48 87.77,19.36 | 87.77,19.36 89.54,21.12 89.54,21.33 EPD_C5.1 | v82.61,24.45 81.85,25.21 C7.1 | v87.6,19.46 87.67,19.46 87.77,19.36
  Bottom 0.3: v87.6,19.46 v82.61,24.45
EPD_3V3_C  (via drill 0.3)
  Top 0.3: 72.44,27.91 72.44,26.8 R_CL1.2 | 72.44,27.91 79.84,35.32 81.23,35.32 81.44,35.11 81.44,34.07 79.78,32.41 79.64,32.41 75.55,28.32 75.55,27.56 76.31,26.8 Q2.1 | v27.63,55.82 20.57,62.88 U2.18 | v42.17,54.57 42.17,50.28 64.47,27.98 72.3,27.98 72.44,27.91
  Bottom 0.3: v27.63,55.82 40.93,55.82 v42.17,54.57
EPD_CS  (via drill 0.3)
  Top 0.15: v86.28,16.69 86.28,15.51 J1.12 | v75.55,22.23 74.79,22.99 D6.2 74.72,23.06 74.1,23.68 73.06,23.68 71.74,25 71.74,25.9 71.88,26.04 72.78,26.04 73.47,26.73 74.03,26.73 R9.1
  Bottom 0.15: v86.28,16.69 86.08,16.69 80.54,22.23 v75.55,22.23
EPD_DC  (via drill 0.3)
  Top 0.15: v86.84,16.2 86.84,15.51 J1.11 | v43.77,27.21 33.24,27.21 19.67,40.79 17.66,40.79 12.95,45.5 12.95,45.7 U2.5
  Bottom 0.15: v86.84,16.2 86.01,16.2 85.8,16 80.75,16 69.53,27.21 v43.77,27.21
EPD_RST  (via drill 0.3)
  Top 0.15: v87.32,14.4 87.32,15.44 J1.10 | v22.16,49.38 22.16,57.55 16.76,62.95 U2.21
  Bottom 0.15: v87.32,14.4 87.12,14.4 86.63,13.92 78.6,13.92 69.25,23.27 46.6,23.27 22.16,47.71 v22.16,49.38
FLASH_CS
  Top 0.15: D9.2 36.08,48.89 34.49,48.89 R5.1 34.49,48.96 29.98,53.46 | 29.98,53.46 29.98,54.98 31.02,56.02 36.15,56.02 U1.1 | 29.98,53.46 29.29,53.46 21.88,46.05 21.88,45.77 U2.12
GDR
  Top 0.15: 66.27,15.23 65.23,15.23 63.85,13.85 63.85,11.43 64.13,11.15 87.39,11.15 91.34,15.1 J1.2 | 66.27,15.23 66.97,14.54 R4.1 | 66.27,15.23 68.9,17.87 Q3.1
GND  (via drill 0.3)
  Top 0.15: U2.29_1 12.33,51.73 12.33,52.91 U2.29_2 12.33,53.05 12.33,54.22 U2.29_3 | U2.29_1 12.4,51.73 13.57,51.73 U2.29_4 13.57,51.8 13.57,52.91 U2.29_5 | U2.29_3 12.4,54.22 13.57,54.22 U2.29_6 13.64,54.22 14.82,54.22 U2.29_9 14.82,54.15 14.82,53.05 U2.29_8 14.89,52.91 14.89,51.73 U2.29_7 14.96,51.73 v18.14,51.73 | U2.1 7.89,45.77 7.89,48.13 11.49,51.73 12.26,51.73 U2.29_1 | U2.29_3 12.33,54.29 7.89,58.72 7.89,63.23 U2.28 7.83,63.29 7.83,63.85 2.01,69.67 2.01,82.34 J4.G3 2.01,82.41 2.01,89.26 5.4,92.66 J4.P6 5.61,92.73 5.4,92.73 3.64,94.49 | C6.2 67.24,108.24 65.79,108.24 BOOT_BUTTON.2 65.72,108.24 62.33,108.24 BOOT_BUTTON.1 62.19,108.17 61.63,107.61 61.01,107.61 54.64,101.24 52.08,101.24 C_DELAY.2 52.01,101.31 51.38,101.31 v51.18,101.52 | 3.64,94.49 2.98,95.15 2.98,95.5 J4.G4 | C5.2 52.91,108.17 RESET_BUTTON.2 50.69,108.1 49.44,108.1 48.41,107.06 48.34,107.06 | 48.34,101.59 47.78,101.04 47.64,101.04 IC1.3 | 48.34,107.06 48.34,101.59 | 48.34,107.06 47.3,108.1 RESET_BUTTON.1 47.23,108.17 46.67,108.17 46.12,108.72 28.18,108.72 27.7,108.24 C10.2 27.63,108.24 25.76,108.24 CHANGE_BUTTON.2 25.69,108.24 22.3,108.24 CHANGE_BUTTON.1 22.23,108.24 21.68,108.24 20.98,108.93 19.94,108.93 14.75,103.74 14.75,99.93 14.2,99.37 D8.1 | D8.1 14.27,99.23 12.4,101.11 11.01,101.11 10.53,100.62 9.7,100.62 C9.2 9.7,100.55 3.64,94.49 | J4.G1 16.2,85.39 16.2,86.42 15.37,87.25 15.37,90.16 16.2,91 J4.G2 16.2,91.13 14.34,93 14.34,99.17 D8.1 | v48.48,101.52 48.41,101.59 48.34,101.59 | 37.33,52.28 38.16,52.28 40.03,54.15 U1.9 | 37.33,52.28 36.22,52.28 U1.4 | 33.93,48.13 35.04,48.13 35.73,47.44 36.08,47.44 D9.1
  Top 0.15: 33.93,48.13 33.79,47.99 33.79,47.09 34.69,46.19 36.84,46.19 | 36.84,46.19 37.33,46.67 37.33,52.28 | 36.84,46.19 36.84,46.12 45.29,37.67 45.29,30.19 D12.1 45.36,30.12 49.79,30.12 D11.1 49.86,30.05 51.59,30.05 D10.1 51.66,30.05 54.22,30.05 66.93,17.35 | 87.88,23.06 87.88,27.35 | 87.88,27.35 87.88,27.98 D3.1 | 87.88,23.06 88.22,22.71 EPD_C6.2 88.36,22.71 89.54,22.71 EPD_C5.2 89.61,22.64 89.61,22.51 90.3,21.81 90.3,16.07 | EPD_C11.2 81.16,22.71 79.84,22.71 EPD_C12.2 79.92,22.78 v79.92,23.48 | v79.92,25.48 80.61,25.48 C7.2 | v82.89,23.41 82.89,22.78 EPD_C10.2 82.61,22.71 84,22.71 EPD_C9.2 84.07,22.78 85.39,22.78 EPD_C8.2 85.39,22.71 86.77,22.71 EPD_C7.2 86.84,22.71 87.19,23.06 87.88,23.06 | TP5.TP 57.48,3.25 63.29,3.25 TP4.TP 63.29,3.32 63.29,13.71 66.93,17.35 | R4.2 65.65,14.47 65.23,14.47 64.13,13.37 64.13,11.56 64.26,11.43 65.58,11.43 66.41,12.26 66.41,12.46 SJ1.1 66.48,12.26 66.83,11.91 68.63,11.91 R2.1 68.7,11.91 72.3,11.91 76.35,15.96 | 73.27,20.5 73.27,22.99 D6.1 | 73.27,20.5 73.27,19.88 EPD_C1.2 73.27,19.8 72.64,19.18 72.64,18.07 73.47,17.24 EPD_C2.2 73.54,17.04 75.28,17.04 76.35,15.96 | 83.79,15.03 83.31,14.54 81.44,14.54 79.92,13.02 79.36,13.02 J1.MP2 79.29,13.02 76.35,15.96 | 83.79,15.03 83.79,15.44 J1.17 | 83.79,15.03 83.86,15.03 84.97,13.92 87.46,13.92 88.29,14.75 88.29,15.44 J1.8 88.36,15.51 88.36,15.86 88.57,16.07 90.3,16.07 | 90.3,16.07 92.1,16.07 92.8,15.37 92.8,13.02 J1.MP1 | 66.93,17.35 68.83,19.25 70.15,19.25 71.4,20.5 73.27,20.5 | J2.B12 163.36,51.24 163.36,50.97 J2.A1 163.43,50.9 163.43,49.72 163.91,49.24 J2.MP3 163.98,49.24 165.92,49.24
  Top 0.15: 165.92,49.24 167.86,49.24 J2.MP1 | 165.92,59.42 163.98,59.42 J2.MP4 163.91,59.35 163.43,58.86 163.43,57.69 J2.A12 163.36,57.62 163.36,57.41 J2.B1 163.29,57.41 156.71,57.41 149.16,49.86 D1.2 | 165.92,59.42 167.86,59.42 J2.MP2 | 165.92,59.42 165.92,49.24 | 144.8,49.38 148.4,49.38 148.82,49.79 D1.2 | 144.8,49.38 144.11,49.38 C5_USB.2 | R2-USB1.1 150.2,46.12 151.38,47.3 R2-USB.2 | C4_USB.2 153.04,50.34 153.04,48.89 151.45,47.3 R2-USB.2 | D1.2 148.89,49.79 149.16,49.79 151.52,47.44 R2-USB.2 | U4.9 133.24,54.36 132.61,53.74 132.27,53.74 U4.4 132.2,53.6 132.2,52.01 130.88,50.69 126.59,50.69 124.79,52.49 124.72,52.49 | U4.1 132.27,55.12 132.54,55.12 133.24,54.43 U4.9 | U4.9 133.31,54.36 133.44,54.22 134.14,54.22 U4.6 134.21,54.15 141.69,54.15 144.8,51.04 144.8,49.38 | 124.72,52.49 121.33,49.1 R2_BAT.1 | 124.72,52.49 124.72,53.25 124.17,53.81 123.96,53.81 MCP73831.2 123.89,53.88 123.61,53.88 123.06,54.43 123.06,55.4 126.52,58.86 127.42,58.86 | 127.42,58.86 128.04,58.24 128.25,58.24 C2_BAT.2 | C1.2 157.89,6.99 C2.2 157.06,7.06 157.06,9.97 SENSOR2.5 156.99,10.04 156.99,10.18 156.44,10.73 | 156.44,10.73 155.88,10.73 155.4,10.25 155.4,10.04 SENSOR2.7 | 155.05,13.64 154.63,13.23 154.63,12.95 SENSOR2.1 | 155.05,13.64 157.27,13.64 157.47,13.43 | 157.47,13.43 157.47,11.84 156.44,10.8 156.44,10.73 | J3.1 165.23,17.8 161.91,17.8 157.54,13.43 157.47,13.43 | 110.39,55.26 110.52,55.4 111.35,55.4 112.05,54.71 112.19,54.71 C1_BAT.2 112.25,54.71 123.2,65.65 130.47,65.65 131.16,64.96 131.16,63.92 127.42,60.18 127.42,58.86 | 110.39,55.26 110.39,44.6 113.02,41.97 R1_PWRUSB.1 113.08,41.9 115.23,39.75 115.23,37.6 C1_BAT1.2 115.3,37.53 115.92,36.91 117.03,36.91 119.04,38.92 119.04,39.2
  Top 0.15: 95.91,60.52 105.05,60.52 110.31,55.26 110.39,55.26 | 95.91,60.52 93.69,60.52 C8.2 | 119.04,39.2 119.04,40.79 118.56,41.27 118.42,41.27 IC4.2 | v95.91,52.56 95.91,51.11 C10_SUPERCAP.1 | 95.91,60.52 v95.91,54.98 95.91,54.91 97.16,53.67 97.16,47.99 95.22,46.05 94.6,46.05 | 94.6,46.05 88.78,46.05 86.77,48.06 86.77,49.38 U3.13 | 119.04,39.2 125.48,39.2 C3.- 125.55,39.2 126.45,40.1 129.01,40.1 C1_BAT2.2 129.01,40.03 155.05,13.99 155.05,13.64 | 87.88,27.35 92.03,27.35 94.6,29.92 94.6,46.05 | v30.75,51.38 33.93,48.2 33.93,48.13
  Bottom 0.15: v48.48,101.52 v51.18,101.52 | v79.92,25.48 v79.92,23.48 82.82,23.48 v82.89,23.41 | v95.91,54.98 v95.91,52.56 | v18.14,51.73 30.4,51.73 v30.75,51.38
  pour Top: 76.96,10.06 76.99,10.07 95.21,10.07 95.24,10.06 95.26,10.04 95.28,10.01 95.28,0.07 170.12,0.07 170.12,67.12 92.19,67.12 92.16,67.14 92.14,67.16 92.12,67.19 92.12,111.12 68.08,111.12 68.08,110.49 68.06,110.46 68.04,110.44 68.01,110.42 19.89,110.42 19.86,110.44 19.84,110.46 19.82,110.49 19.82,111.12 0.07,111.12 0.07,0.07 76.92,0.07 76.92,10.01 76.94,10.04
GPIO8
  Top 0.15: R1.2 19.25,41.41 19.25,45.7 U2.10
I2C_PW  (via drill 0.3)
  Top 0.15: C1.1 157.89,5.75 156.64,5.75 C2.1 156.57,5.75 155.33,5.75 R1_PINH.1 155.26,5.75 154.01,5.75 R2-PINH.1 154.01,5.82 153.32,6.51 153.32,7.48 155.09,9.24 | 155.09,9.24 155.12,9.21 155.67,9.21 156.16,9.7 156.16,9.97 SENSOR2.6 | 155.09,9.24 154.63,9.7 154.63,9.97 SENSOR2.8 154.63,10.04 154.63,10.32 155.33,11.01 155.33,12.19 | 155.33,12.19 155.33,12.88 SENSOR2.2 | v24.03,60.8 21.88,62.95 21.88,63.23 U2.17 | v96.53,55.95 96.53,55.19 139.54,12.19 155.33,12.19
  Bottom 0.15: v24.03,60.8 91.69,60.8 v96.53,55.95
INT_RTC  (via drill 0.3)
  Top 0.15: 88.36,61.56 89.19,61.56 89.82,60.94 89.82,57.82 93.21,54.43 93.21,50.21 R1_PINH1.1 | 88.36,61.56 88.02,61.22 88.02,58.72 U3.3 87.95,58.66 87.95,58.31 79.78,50.14 v43.07,50.14 | v20.29,49.51 16.76,45.98 16.76,45.77 U2.8 | v88.16,74.65 88.16,79.92 TP15.TP | v88.16,61.84 88.36,61.63 88.36,61.56
  Bottom 0.15: v20.29,49.51 21.68,49.51 22.3,50.14 v43.07,50.14 | v88.16,61.84 v88.16,74.65
IO/BOOT
  Top 0.15: C6.1 67.24,109.55 65.93,109.55 65.79,109.69 BOOT_BUTTON.3 65.72,109.76 62.26,109.76 BOOT_BUTTON.4 62.19,109.69 62.05,109.55 60.8,109.55 R_BOOT.2 60.73,109.48 59.35,109.48 57.48,107.61 53.39,107.61 49.24,103.46 49.24,101.52 24.38,76.66 U2.15
IO/CHANGE  (via drill 0.3)
  Top 0.15: C10.1 27.63,109.55 25.9,109.55 25.76,109.69 CHANGE_BUTTON.3 25.69,109.76 22.3,109.76 CHANGE_BUTTON.4 22.23,109.69 22.16,109.62 20.5,109.62 R_CHANGE.2 20.43,109.55 20.15,109.55 14.27,103.67 v14.27,100.07 | v14.27,84.83 14.27,63.29 U2.23
  Bottom 0.15: v14.27,100.07 v14.27,84.83
MISO  (via drill 0.3)
  Top 0.15: R8.1 45.43,26.52 45.43,28.6 45.36,28.67 D12.2 45.29,28.74 45.29,28.88 30.26,43.9 30.26,52.77 29.92,53.12 29.57,53.12 v28.81,52.35 | v30.47,54.85 36.15,54.85 U1.2 | v9.97,62.12 9.14,62.95 U2.27 | v7.34,92.38 6.03,93.69 5.82,93.69 J4.P7 | v56.72,102.7 77.49,102.7 TP6.TP
  Bottom 0.15: 27.42,54.85 17.24,54.85 v9.97,62.12 9.97,62.19 7.34,64.82 v7.34,92.38 7.34,93.76 16.27,102.7 v56.72,102.7 | 27.42,54.85 v30.47,54.85 | v28.81,52.35 28.05,52.35 27.42,52.98 27.42,54.85
MOSI  (via drill 0.3)
  Top 0.15: v84.97,14.68 85.32,15.03 85.32,15.44 J1.14 | v50.55,25.83 49.86,26.52 R7.1 49.86,28.53 D11.2 49.79,28.6 v49.03,29.36 | v43.56,50.62 43.97,51.04 43.97,52.22 U1.5 44.04,52.22 v46.4,54.57 | v19.67,50.14 15.51,45.98 15.51,45.77 U2.7 | v5.05,88.64 5.75,89.33 J4.P3 | v50.21,58.38 89.12,97.3 89.12,102.91 TP7.TP
  Bottom 0.15: v84.97,14.68 81.23,14.68 70.08,25.83 v50.55,25.83 | v49.03,29.36 43.56,34.83 v43.56,50.62 22.37,50.62 21.88,50.14 v19.67,50.14 18.7,50.14 5.05,63.78 v5.05,88.64 | v46.4,54.57 v50.21,58.38
N$1
  Top 0.15: R2-USB1.2 154.29,46.12 161.21,53.05 163.36,53.05 J2.A5
N$2
  Top 0.15: C1_BAT1.1 116.62,37.6 116.62,38.57 118.35,40.3 IC4.3 118.35,40.44 118.21,40.44 117.59,41.06 117.59,41.62 | 117.59,41.62 115.3,41.62 D2.1 | 117.59,41.62 118.21,42.24 118.35,42.24 IC4.1 118.42,42.31 119.53,43.42 124.72,43.42 130.54,49.24 131.3,49.24 Q1.2
N$3
  Top 0.15: R1_BAT.1 116.41,52.63 116.62,52.63 117.24,52.01 119.25,52.01 120.63,53.39 123.13,53.39 123.61,52.91 123.89,52.91 MCP73831.1
N$4  (via drill 0.3)
  Top 0.15: v150.13,48.13 150.13,47.3 R2-USB.1 | v162.39,55.61 162.81,56.02 163.36,56.02 J2.B5
  Bottom 0.15: v150.13,48.13 154.91,48.13 v162.39,55.61
N$5
  Top 0.15: CHG_LED.C 117.79,53.95 117.79,52.77 117.72,52.7 R1_BAT.2
N$6
  Top 0.15: J1.24 80.33,15.51 80.33,20.91 79.84,21.4 EPD_C12.1
N$7
  Top 0.15: R2_BAT.2 121.33,50.41 121.33,52.84 MCP73831.5
N$8
  Top 0.15: C4.1 93.9,30.33 93.63,30.33 91.34,28.05 D3.2 91.34,28.12 87.88,31.58 D4.1
N$9
  Top 0.15: C_DELAY.1 52.01,102.56 50.76,102.56 50.48,102.84 IC1.5
N$10
  Top 0.15: J1.22 81.37,15.51 81.37,20.22 82.55,21.4 EPD_C10.1
N$12
  Top 0.15: J1.20 82.41,15.51 82.41,18.49 85.39,21.47 EPD_C8.1
N$13
  Top 0.15: J1.19 82.89,15.51 82.89,17.52 86.77,21.4 EPD_C7.1
N$14
  Top 0.15: J1.18 83.38,15.51 83.38,16.48 EPD_C6.1
N$16  (via drill 0.3)
  Top 0.15: v87.81,13.64 88.43,13.64 89.82,15.03 89.82,15.44 J1.5 | v74.51,14.75 72.23,17.04 EPD_C2.1
  Bottom 0.15: v87.81,13.64 75.62,13.64 v74.51,14.75
N$17  (via drill 0.3)
  Top 0.15: v80.68,13.16 88.43,13.16 90.3,15.03 90.3,15.44 J1.4 | v74.03,17.87 73.34,18.56 EPD_C1.1
  Bottom 0.15: v80.68,13.16 75.48,13.16 74.03,14.61 v74.03,17.87
N$22
  Top 0.15: D7.1 87.19,62.81 87.19,61.08 87.39,60.87 R_CAPACITOR.2
PREVGH
  Top 0.15: EPD_C9.1 84,21.4 81.85,19.25 81.85,15.51 J1.21 81.78,15.44 81.78,15.03 81.58,14.82 80.12,14.82 79.98,14.96 79.98,18.42 75.69,22.71 75.69,24.93 75,25.62 75,28.32 80.54,33.86 80.54,34.56 D5.1
PREVGL
  Top 0.15: J1.23 80.88,15.51 80.88,21.05 81.16,21.33 EPD_C11.1 81.23,21.4 81.85,22.02 81.85,23.06 82.06,23.27 82.13,23.27 85.39,26.52 85.39,30.4 87.25,32.27 88.5,32.27 89.12,31.65 91.34,31.65 D4.2
RESE  (via drill 0.3)
  Top 0.15: v80.19,12.67 88.43,12.67 90.79,15.03 90.79,15.44 J1.3 | Q3.2 70.29,17.87 70.57,17.59 v70.91,17.59 70.91,18.7 71.95,19.74 71.95,19.88 R3.1
  Bottom 0.15: v80.19,12.67 75.55,12.67 70.91,17.31 v70.91,17.59
RESE'
  Top 0.15: SJ1.2 64.96,12.53 64.96,12.67 65.79,13.5 67.17,13.5 67.45,13.23 68.63,13.23 R2.2 68.63,13.3 68.63,14.68 71.95,18 71.95,18.63 R3.2
RESET  (via drill 0.3)
  Top 0.15: C5.1 52.91,109.55 50.83,109.55 50.76,109.62 RESET_BUTTON.3 50.69,109.69 47.3,109.69 RESET_BUTTON.4 47.23,109.62 47.09,109.48 45.57,109.48 R_RESET.2 45.5,109.42 45.29,109.21 v44.74,109.21 | v10.39,50 10.39,45.77 U2.3
  Bottom 0.15: v10.39,50 10.39,58.03 4.22,64.19 4.22,91.34 22.09,109.21 v44.74,109.21
RTC_RST  (via drill 0.3)
  Top 0.15: v24.79,61.29 23.13,62.95 23.13,63.23 U2.16 | v84.48,61.29 86.7,59.07 86.7,58.72 U3.4
  Bottom 0.15: v84.48,61.29 v24.79,61.29
RX
  Top 0.15: U2.24 12.88,63.29 12.88,64.89 3.74,74.03 TP2.TP
SCK  (via drill 0.3)
  Top 0.15: v85.66,16.48 85.8,16.34 85.8,15.51 J1.13 | D10.2 51.66,28.6 v52.35,27.91 52.35,27.84 51.66,27.15 51.66,26.59 R6.1 | v44.04,52.84 44.04,53.46 U1.6 43.97,53.6 v44.94,54.57 | v19.04,50.83 14.27,46.05 14.27,45.77 U2.6 | v4.71,91.2 5.05,91.55 5.75,91.55 J4.P5 | v50.21,59.83 83.17,92.8 83.17,102.7 TP8.TP
  Bottom 0.15: v85.66,16.48 80.68,16.48 69.25,27.91 v52.35,27.91 52.35,27.98 44.04,36.29 44.04,51.11 | 44.04,51.11 v44.04,52.84 | 44.04,51.11 43.42,51.11 43.21,50.9 22.23,50.9 22.16,50.83 v19.04,50.83 18.42,50.83 7.06,62.19 7.06,87.25 4.71,89.61 v4.71,91.2 | v44.94,54.57 v50.21,59.83
SCL  (via drill 0.3)
  Top 0.15: v134.97,54.64 134.21,54.64 U4.7 | v165.23,24.38 165.23,20.84 J3.4 165.3,20.77 165.58,20.77 166.2,20.15 166.2,14.2 158.44,6.44 154.7,6.44 154.15,6.99 154.01,6.99 R2-PINH.2 | v156.99,11.98 156.99,12.88 SENSOR2.4 | v27.91,53.12 18.07,62.95 18.07,63.23 U2.20 | v89.89,50.62 89.89,50.07 90.51,49.44 U3.16 90.58,49.44 90.72,49.58 v91.76,49.58
  Bottom 0.15: 136.8,52.8 v165.23,24.38 165.23,20.71 156.99,12.46 v156.99,11.98 | 136.8,52.8 v134.97,54.64 | v27.91,53.12 28.67,53.12 29.64,52.15 42.73,52.15 43.9,53.32 87.19,53.32 v89.89,50.62 | 136.8,52.8 133.58,49.58 v91.76,49.58
SDA  (via drill 0.3)
  Top 0.15: v155.33,8.73 155.33,7.06 R1_PINH.2 | v155.81,11.98 155.81,12.33 156.16,12.67 156.16,12.88 SENSOR2.3 | J3.3 165.23,19.74 v163.64,19.74 163.64,19.8 v133.38,50.07 | v132.96,55.47 133.58,55.47 133.86,55.19 134.14,55.19 U4.8 | v90.37,51.73 89.33,50.69 89.33,49.44 U3.15 | v21.95,60.32 19.32,62.95 19.32,63.23 U2.19
  Bottom 0.15: v155.33,8.73 155.33,11.49 v155.81,11.98 155.88,11.98 v163.64,19.74 | 94.11,55.47 v132.96,55.47 132.96,55.4 133.38,54.98 v133.38,50.07 | v90.37,51.73 94.11,55.47 | v21.95,60.32 87.88,60.32 90.51,57.69 92.66,57.69 94.11,56.23 94.11,55.47
SRC  (via drill 0.3)
  Top 0.15: C4.2 93.9,31.72 92.52,31.72 89.68,34.56 84.14,34.56 D5.2 84.14,34.49 84.14,33.31 82.48,31.65 L1.1 82.41,31.58 78.81,27.98 v76.11,27.98 | v71.61,26.38 69.6,24.38 69.6,20.01 Q3.3
  Bottom 0.15: v71.61,26.38 74.51,26.38 v76.11,27.98
SS_SD  (via drill 0.3)
  Top 0.15: 8.83,90.89 6.23,88.29 J4.P2 6.16,88.22 5.47,88.22 v3.74,86.49 | 8.83,90.89 12.26,94.32 12.26,99.65 11.56,100.34 11.56,100.48 R10.1 | 8.83,90.89 15.51,84.21 16.9,84.21 17.04,84.35 17.04,94.94 15.86,96.12 15.86,99.17 D8.2 | v11.63,48.13 11.63,45.77 U2.4
  Bottom 0.15: v11.63,48.13 3.74,56.02 v3.74,86.49
TX
  Top 0.15: U2.25 11.63,63.29 11.63,63.5 5.54,69.6 3.81,69.6 TP1.TP
USB_D+  (via drill 0.3)
  Top 0.15: v145.56,38.57 148.82,41.83 148.82,48.82 D1.3 | v44.6,26.73 44.6,27.01 25.9,45.7 24.38,45.7 U2.14
  Bottom 0.15: v145.56,38.57 109.83,38.57 86.98,15.72 80.61,15.72 69.6,26.73 v44.6,26.73
USB_D-  (via drill 0.3)
  Top 0.15: v138.22,61.35 148.82,50.76 D1.1 | v29.78,52.63 23.13,45.98 23.13,45.77 U2.13
  Bottom 0.15: v138.22,61.35 85.04,61.35 84.62,61.77 22.78,61.77 21.47,60.45 21.47,60.18 26.32,55.33 30.61,55.33 30.95,54.98 30.95,54.71 30.61,54.36 29.85,54.36 29.64,54.57 29.36,54.57 29.02,54.22 29.02,53.39 v29.78,52.63
VBAT
  Top 0.3: 126.94,57.76 126.94,58.17 C2_BAT.1 | 126.94,57.76 123.96,54.78 MCP73831.3 | Q1.3 130.4,51.38 130.4,52.77 131.78,54.15 132.06,54.15 U4.3 132.2,54.22 132.2,54.64 U4.2 132.06,54.71 131.78,54.71 131.51,54.98 131.51,55.4 | 131.51,55.4 136.84,60.73 136.84,64.4 TP3.TP | 126.94,57.76 127.07,57.69 127.56,57.69 129.77,55.47 131.37,55.47 131.51,55.4
VBUS  (via drill 0.3)
  Top 0.3: v152.28,51.31 152.63,51.66 153.04,51.66 C4_USB.1 | v152.28,50.28 151.87,49.86 151.38,49.86 D1.5 | 143.35,50.62 144.04,50.62 C5_USB.1 | 143.35,50.62 143.28,50.62 | 143.28,50.62 131.37,50.62 130.05,49.31 129.43,49.31 Q1.1 129.29,49.17 122.64,49.17 121.88,48.41 115.23,48.41 | v143.28,50.76 143.28,50.62 | 143.35,50.62 143.35,48.89 147.29,44.94 147.29,43.21 PFMF.050.1.2 | R1_PWRUSB.2 113.08,43.28 114.82,43.28 115.23,43.7 D2.2 115.23,43.84 115.23,48.41 | 115.23,53.95 116.2,53.95 CHG_LED.A 116.34,54.02 116.62,54.02 117.31,54.71 121.26,54.71 MCP73831.4 121.39,54.85 129.91,63.36 129.91,64.4 TP14.TP | 115.23,53.95 111.7,53.95 111.01,54.64 C1_BAT.1 | 115.23,53.95 115.23,48.41
  Bottom 0.3: v152.28,50.28 152.28,50.76 | 152.28,50.76 v152.28,51.31 | v143.28,50.76 152.28,50.76
VRTC  (via drill 0.3)
  Top 0.15: 88.71,60.04 88.71,50.14 88.02,49.44 U3.14 88.02,49.38 88.02,49.03 88.92,48.13 93.63,48.13 94.32,48.82 95.91,48.82 C10_SUPERCAP.2 | 88.71,60.04 88.71,60.8 R_CAPACITOR.1 | v92.59,59.28 93.63,59.28 C8.1 | v88.78,60.04 88.71,60.04
  Bottom 0.15: v92.59,59.28 89.54,59.28 v88.78,60.04
VUSB
  Top 0.3: J2.A9 163.36,56.78 163.36,56.58 J2.B4 163.5,56.51 164.05,56.51 164.61,55.95 164.61,52.63 164.05,52.08 163.5,52.08 J2.B9 163.36,52.01 163.36,51.8 J2.A4 163.22,51.73 160.45,51.73 151.87,43.14 PFMF.050.1.1